# EAGLE board Qwiic GPS-RTK - ublox NEO-M8P-TopJig (EAGLE 9.2.0)
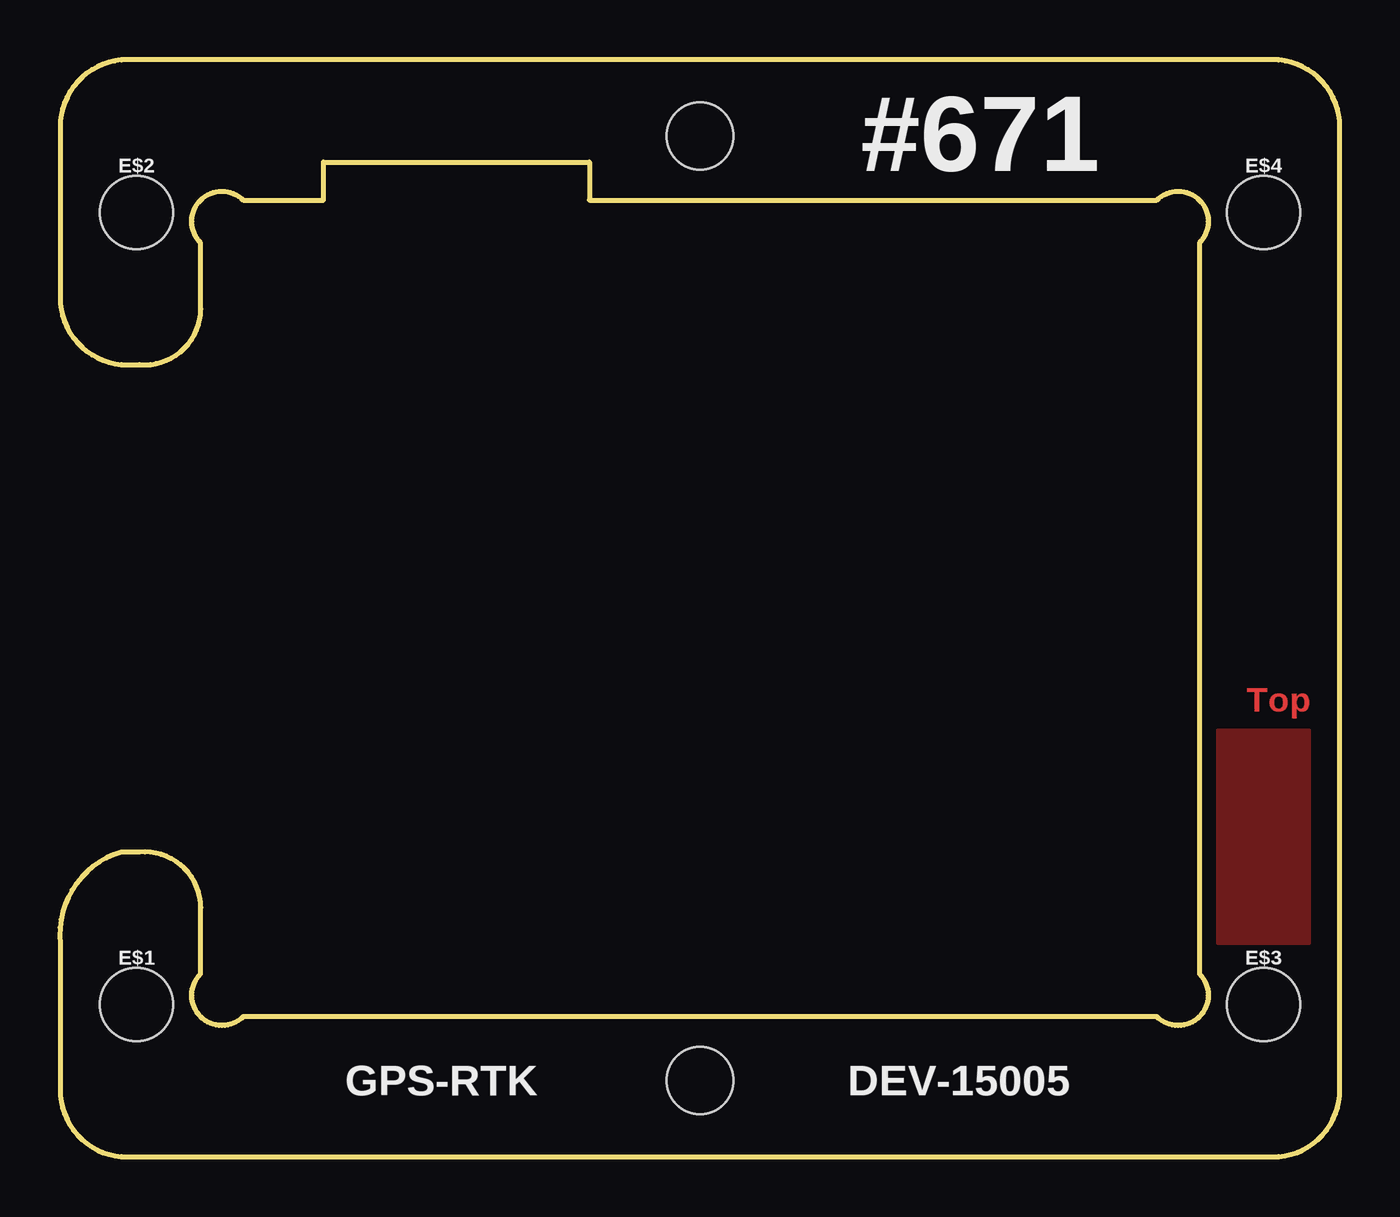
[diagram p0: board, top side]
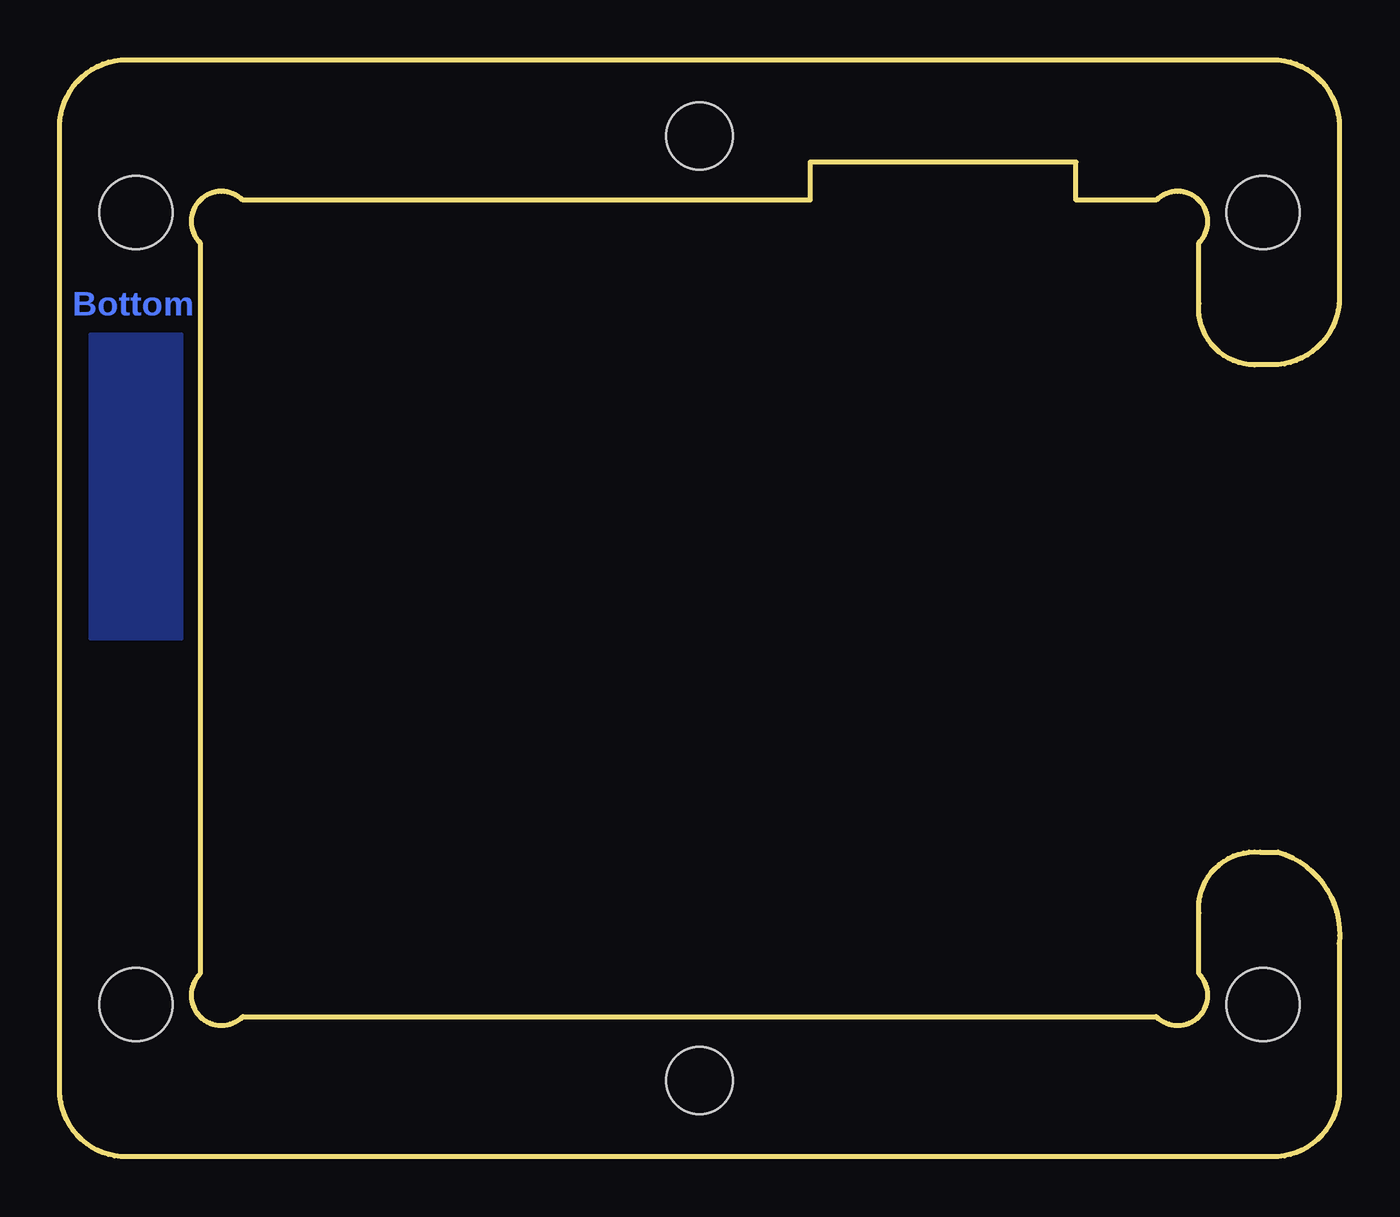
[diagram p1: board, bottom side, seen from below]

Size 53.36 x 45.72 mm. Coordinates in mm from the lower left corner, seen from the top.
Outline: 5.86,38.1 arc-180 7.64,39.88 10.99,39.88 10.99,41.46 22.08,41.46 22.08,39.88 45.74,39.88 arc-180 47.52,38.1 47.52,7.62 arc-180 45.74,5.84 7.64,5.84 arc-180 5.86,7.62 5.86,10.16 arc100 3.32,12.7 2.56,12.7 arc80 0.02,8.89 0.02,2.54 arc80 2.56,0 50.82,0 arc80 53.36,2.54 53.36,43.18 arc80 50.82,45.72 2.56,45.72 arc80 0.02,43.18 0.02,35.56 arc80 2.56,33.02 3.32,33.02 arc100 5.86,35.56 5.86,38.1
Copper layers (1*16): Top 0.035mm / dielectric 1.5mm / Bottom 0.035mm
Design rules "SparkFun-2-layer-PCBWay-LIMIT": minimum track width 6mil, minimum drill 0.3mm, track to track 6mil, track to pad 6mil, pad to pad 6mil, via to via 6mil, smd to smd 6mil, copper to edge 6mil, drill to drill 6mil, minimum pad ring 6mil, minimum via ring 6mil, stop-mask expansion 4mil, vias tented up to drill 25mil, thermal gap 10mil
Net classes: 1 vcc: width 0.152 mm; 2 3.3V: width 0.508 mm

## Footprints (pad centres in the part's own frame; a part is rotated, then mirrored left to right if it is on the bottom)
STAND-OFF-TIGHT = hole 3.048: 0,0
NUBBIN_LOCKER = hole 2.794: 0,0

## Placement (x,y rotation side)
E$1  [STAND-OFF-TIGHT]  3.2,6.35 0 top
E$2  [STAND-OFF-TIGHT]  3.2,39.37 0 top
E$3  [STAND-OFF-TIGHT]  50.19,6.35 0 top
E$4  [STAND-OFF-TIGHT]  50.19,39.37 0 top
E$5  [NUBBIN_LOCKER]  26.69,3.17 0 top
E$6  [NUBBIN_LOCKER]  26.69,42.55 0 top
FRAME1  FRAME-LETTER  [CREATIVE_COMMONS]  -11.41,-11.43 0 top  (outside the outline)

## Library data of the parts
E$1-E$6 = SparkFun-Hardware
FRAME1 = SparkFun-Aesthetics

## Tracks (layer width: path | path; a pad name or v marks a point on that pad's centre or on a via)
GND
  pour Top (isolate 0.305): 48.28,17.78 52.09,17.78 52.09,8.89 48.28,8.89
  pour Bottom (isolate 0.305): 48.28,34.29 52.09,34.29 52.09,21.59 48.28,21.59

## Text on the board
Top: Top
Bottom: Bottom
tPlace: #671 | GPS-RTK | DEV-15005
Measures: Measurements in inches